# Altium PCB PowerDistReva.PcbDoc
Units mm, origin at the board's own origin, x right, y up, seen from the top; angles counter-clockwise.
Board outline 152.4 x 101.6 mm, 2 copper layers (Top Layer, Bottom Layer); 24 components, 6 nets, 56 pads, 0 vias.
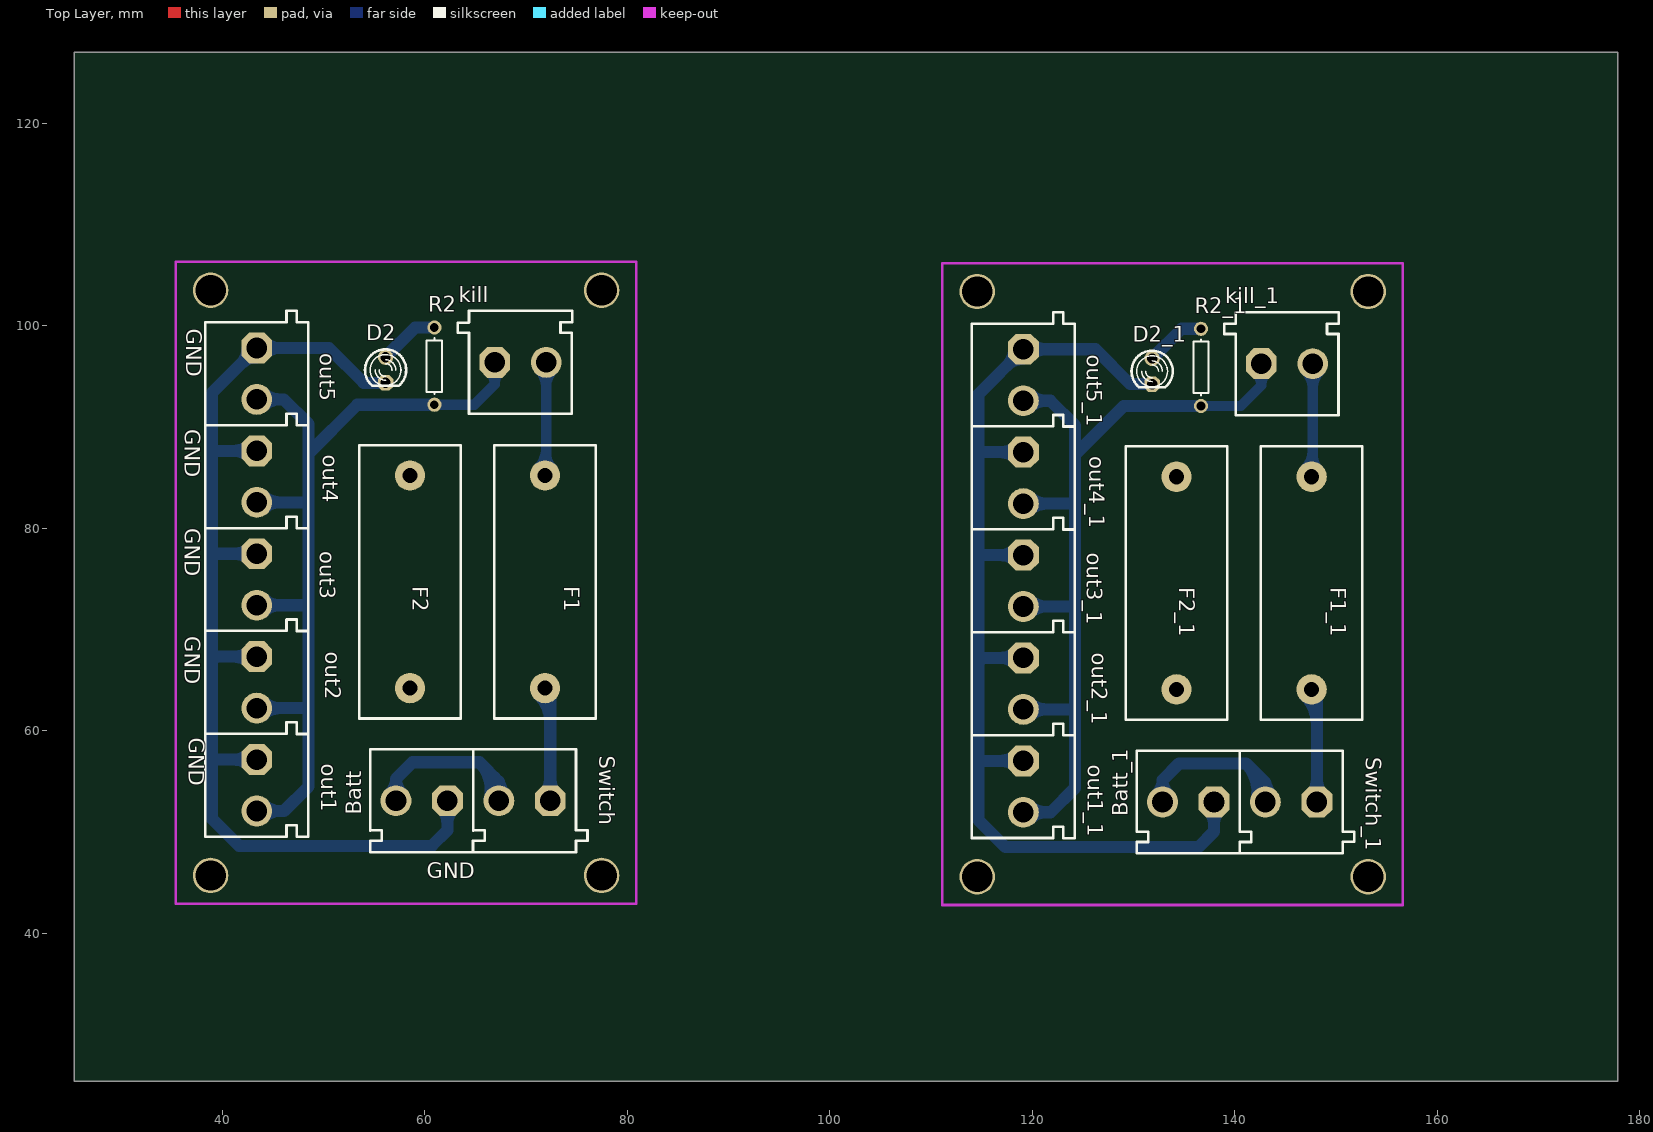
[diagram p0: Top Layer view]
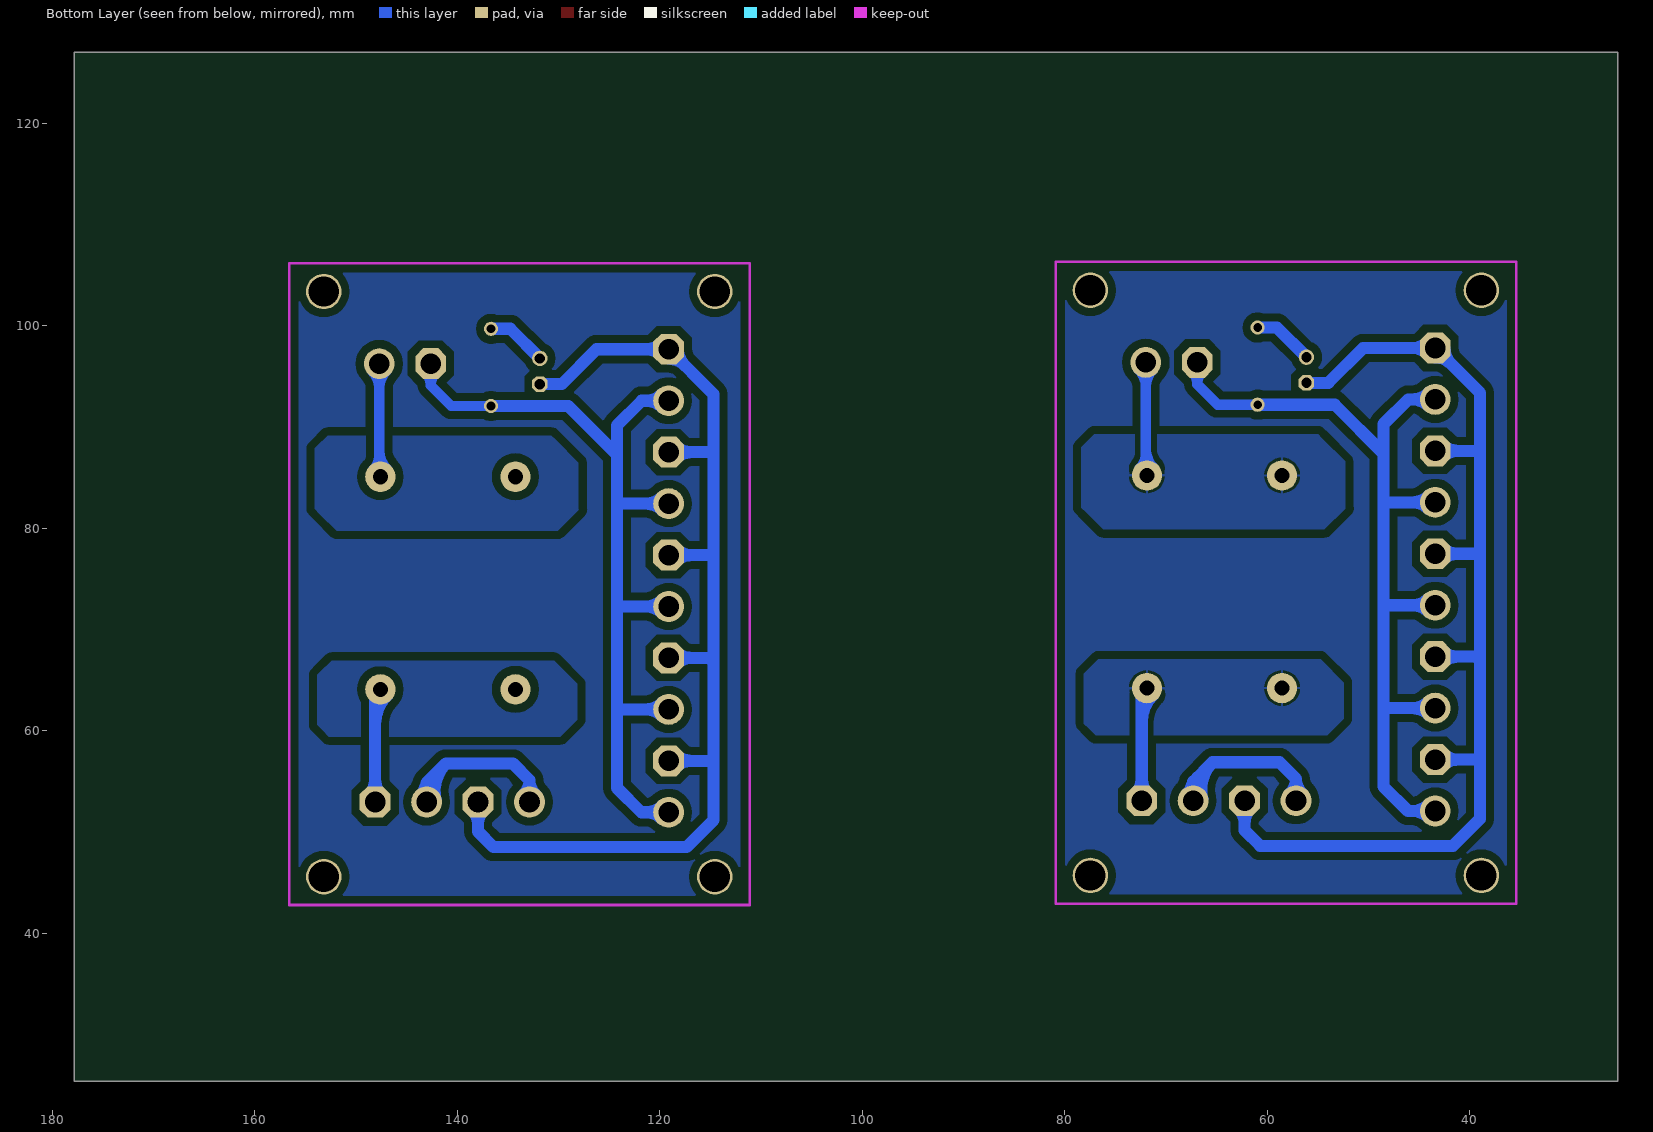
[diagram p1: Bottom Layer view, seen from below]

## Layer stack, top to bottom
Top Solder: solder mask 0.0102, Solder Resist, Dk 3.5
Top Layer: signal copper 0.0356
Dielectric 1: dielectric 0.32, FR-4, Dk 4.8
Bottom Layer: signal copper 0.0356
Bottom Solder: solder mask 0.0102, Solder Resist, Dk 3.5

## Board outline
25.4,25.4 177.8,25.4 177.8,127 25.4,127

## Design rules (kind name [scope] priority, off if disabled: settings)
Clearance [All] p1: gap=0.8
PolygonConnect [All] p1: connectstyle=Relief reliefconductorwidth=0.254 reliefentries=4 polygonreliefangle="90 Angle" airgapwidth=0.254
RoutingVias [All] p1: holewidth=0.711 width=1.27 viastyle="Through Hole" minholewidth=0.711 minwidth=1.27 maxholewidth=0.711 maxwidth=1.27
SolderMaskExpansion [All] p1: expansion=0.102
Width [All] p1: maxlimit=1.5 minlimit=1 preferedwidth=1 minimp=50.000000 maximp=50.000000 favimp=50.000000
29 further rules are at their usual default settings.

## Components (designator, comment, footprint, x,y, rotation, side; value= is the part's Value field where it differs from the comment)
Batt "CON2 pin blue" My_CN2 64.77,48.006 r180 top
Batt_1 "CON2 pin blue" My_CN2 140.462,47.879 r180 top (schematic designator Batt)
D2 "LED" My_LED3MM 56.134,95.631 r270 top
D2_1 "LED" My_LED3MM 131.826,95.504 r270 top (schematic designator D2)
F1 "Fuse 2" PCBComponent_1 71.882,85.217 r270 top
F1_1 "Fuse 2" PCBComponent_1 147.574,85.09 r270 top (schematic designator F1)
F2 "Fuse 2" PCBComponent_1 58.547,85.217 r270 top
F2_1 "Fuse 2" PCBComponent_1 134.239,85.09 r270 top (schematic designator F2)
kill "CON2 pin blue" My_CN2 64.389,101.473 r0 top
kill_1 "CON2 pin blue" My_CN2 140.081,101.346 r0 top (schematic designator kill)
out1 "CON2 pin blue" My_CN2 48.514,59.69 r270 top
out1_1 "CON2 pin blue" My_CN2 124.206,59.563 r270 top (schematic designator out1)
out2 "CON2 pin blue" My_CN2 48.514,69.85 r270 top
out2_1 "CON2 pin blue" My_CN2 124.206,69.723 r270 top (schematic designator out2)
out3 "CON2 pin blue" My_CN2 48.514,80.01 r270 top
out3_1 "CON2 pin blue" My_CN2 124.206,79.883 r270 top (schematic designator out3)
out4 "CON2 pin blue" My_CN2 48.514,90.17 r270 top
out4_1 "CON2 pin blue" My_CN2 124.206,90.043 r270 top (schematic designator out4)
out5 "CON2 pin blue" My_CN2 48.514,100.33 r270 top
out5_1 "CON2 pin blue" My_CN2 124.206,100.203 r270 top (schematic designator out5)
R2 "Res1" AXIAL-0.3 60.96,96.012 r90 top
R2_1 "Res1" AXIAL-0.3 136.652,95.885 r90 top (schematic designator R2)
Switch "CON2 pin blue" My_CN2 74.93,48.006 r180 top
Switch_1 "CON2 pin blue" My_CN2 150.622,47.879 r180 top (schematic designator Switch)

## Footprints (in the part's own frame and the unit in brackets; to place one, negate y for a bottom-side part, rotate by r counter-clockwise, add the part's x,y. Pads: shape width x height; smd on the part's side, far side on the other; paste and mask are expansions set on the pad)
AXIAL-0.3 [mm] "Axial Device, Thru-Hole; 2 Leads; 0.3 in Pin Spacing"
  round 1.4 hole 0.85: 1(-3.81,0) 2(3.81,0)
  silkscreen extent -2.77,-0.76 2.77,0.76
My_CN2 [mil]
  oct 120x120 hole 80: 1(99.5,-200.5)
  round 120 hole 80: 2(299.5,-200.5)
  silkscreen extent -45,-400 400,0
My_LED3MM [mil]
  round 60 hole 40: A(-50,0)
  oct 60x60 hole 40: K(50,0)
  silkscreen extent -80,-80 62,80
PCBComponent_1 [mm]
  round 3 hole 1.5: 1(0,0) 2(21,0)
  silkscreen extent -3,-5 24,5

## Part data
Batt Batt_1 kill kill_1 out1 out1_1 out2 out2_1 out3 out3_1 out4 out4_1 out5 out5_1 Switch Switch_1: "Connector blue screw"
D2 D2_1: "Typical INFRARED GaAs LED"
F1 F1_1 F2 F2_1: "Fuse"
R2 R2_1: "Resistor"

## Free pads (board coordinates)
  round 3.5 hole 3: 0(38.862,103.505) 0(77.47,45.72) 0(77.47,103.505) 0(114.554,103.378) 0(153.162,45.593) 0(153.162,103.378) 4(38.862,45.72) 4(114.554,45.593)

## Nets (pads, with @x,y where several pads share a name; then routed paths per layer and width w, separated by ;. In a path a pad name is that pad's centre, name@x,y a point inside that pad or via, vN(x,y) a via of type N, cw(c..) or ccw(c..) an arc to the next point about the centre after c; other vN are vias at no path point)
GND: Batt.1 D2.K out1.1 out2.1 out3.1 out4.1 out5.1 | length 132.8
  Bottom Layer w1.2: 39.002,57.163 out1.1 ; 39.002,77.483 out3.1 ; 39.002,87.643 out4.1 ; out5.1@42.497,97.803 cw(c40.267,97.803) 41.844,96.225 cw(c43.421,94.648) out5.1@43.421,96.879 ; out1.1@42.768,56.509 ccw(c41.191,54.932) 41.191,57.163 ccw(c41.191,59.393) out1.1@42.768,57.816 ; out2.1@42.768,66.669 ccw(c41.191,65.092) 41.191,67.323 ccw(c41.191,69.553) out2.1@42.768,67.976 ; out3.1@42.768,76.829 ccw(c41.191,75.252) 41.191,77.483 ccw(c41.191,79.713) out3.1@42.768,78.136 ; out4.1@42.768,86.989 ccw(c41.191,85.412) 41.191,87.643 ccw(c41.191,89.873) out4.1@42.768,88.296 ; out2.1 39.383,67.323 38.989,66.929 ; out5.1@44.075,97.149 cw(c45.652,95.572) 45.652,97.803 cw(c45.652,100.033) out5.1@44.075,98.456 ; D2.K 53.975,94.361 50.533,97.803 out5.1 38.989,93.37 38.989,66.929 ; Batt.1@61.589,52.445 cw(c60.012,50.868) 62.243,50.868 cw(c64.473,50.868) Batt.1@62.896,52.445 ; Batt.1 62.243,50.178 60.706,48.641 41.656,48.641 38.989,51.308 38.989,66.929
NetD2_A: D2.A R2.2 | length 6
  Bottom Layer w1.2: D2.A 59.055,99.822 R2.2
NetF1_2: F1.2 F2.2 Switch.1 | length 17.9
  Bottom Layer w1.2: F1.2@71.246,63.581 cw(c68.452,60.787) 72.403,60.787 ; Switch.1@71.749,53.752 ccw(c70.172,55.329) 72.403,55.329 ccw(c74.633,55.329) Switch.1@73.056,53.752 ; F1.2 72.403,63.696 Switch.1
VCC: Batt.2 Switch.2 | length 28.1
  Bottom Layer w1.2: Batt.2@56.525,53.767 ccw(c55.103,55.258) 57.163,55.258 ; Batt.2 57.163,55.258 ; Batt.2@57.801,53.767 cw(c59.223,55.258) 57.163,55.258 ; Switch.2@66.423,53.311 ccw(c62.7,54.19) 65.405,56.896 ; Switch.2@66.758,53.83 ccw(c65.873,54.978) 67.323,54.978 ; 66.927,55.374 cw(c65.162,53.609) Switch.2@67.591,53.035 ; Switch.2 67.323,54.978 ; Switch.2@67.887,53.83 cw(c68.772,54.978) 67.323,54.978 ; 57.163,55.258 58.801,56.896 65.405,56.896 ; 65.405,56.896 67.323,54.978
VDD: F1.1 F2.1 kill.2 | length 18.7
  Bottom Layer w1: F1.1@71.175,85.924 ccw(c69.192,87.907) 71.996,87.907 ; kill.2@71.272,95.656 cw(c69.524,93.908) 71.996,93.908 cw(c74.468,93.908) kill.2@72.72,95.656 ; F1.1@71.996,85.331 kill.2 ; 71.996,87.355 ccw(c74.02,87.355) F1.1@72.589,85.924
VDD1: kill.1 out1.2 out2.2 out3.2 out4.2 out5.2 R2.1 | length 107.2
  Bottom Layer w1: R2.1 64.897,92.202 66.916,94.221 ; kill.1@66.268,95.587 cw(c65.153,94.221) 66.916,94.221 ; kill.1 66.916,94.221 ; kill.1@67.564,95.587 ccw(c68.68,94.221) 66.916,94.221
  Bottom Layer w1.2: out1.2 46.114,52.083 48.52,54.489 48.52,87.382 ; out2.2 48.381,62.243 ; out3.2 48.508,72.403 ; out4.2 48.508,82.563 ; out5.2 46.088,92.723 48.52,90.291 48.52,87.382 ; out1.2@44.075,51.429 cw(c45.652,49.852) 45.652,52.083 cw(c45.652,54.313) out1.2@44.075,52.736 ; out2.2@44.075,61.589 cw(c45.652,60.012) 45.652,62.243 cw(c45.652,64.473) out2.2@44.075,62.896 ; out3.2@44.075,71.749 cw(c45.652,70.172) 45.652,72.403 cw(c45.652,74.633) out3.2@44.075,73.056 ; out4.2@44.075,81.909 cw(c45.652,80.332) 45.652,82.563 cw(c45.652,84.793) out4.2@44.075,83.216 ; out5.2@44.075,92.069 cw(c45.652,90.492) 45.652,92.723 cw(c45.652,94.953) out5.2@44.075,93.376 ; R2.1 53.34,92.202 48.52,87.382
pads on no net: Batt_1.1 Batt_1.2 D2_1.A D2_1.K F1_1.1 F1_1.2 F2_1.1 F2_1.2 kill_1.1 kill_1.2 out1_1.1 out1_1.2 out2_1.1 out2_1.2 out3_1.1 out3_1.2 out4_1.1 out4_1.2 out5_1.1 out5_1.2 R2_1.1 R2_1.2 Switch_1.1 Switch_1.2
copper on no net: | length 310.7
  Bottom Layer w1: 136.652,92.075 140.589,92.075 142.608,94.094 ; 141.96,95.46 cw(c140.845,94.094) 142.608,94.094 ; 142.608,96.253 142.608,94.094 ; 143.256,95.46 ccw(c144.372,94.094) 142.608,94.094 ; 146.867,85.797 ccw(c144.884,87.78) 147.688,87.78 ; 146.964,95.529 cw(c145.216,93.781) 147.688,93.781 cw(c150.16,93.781) 148.412,95.529 ; 147.688,85.204 147.688,96.253 ; 147.688,87.228 ccw(c149.712,87.228) 148.281,85.797
  Bottom Layer w1.2: 114.694,57.036 119.113,57.036 ; 114.694,77.356 119.113,77.356 ; 114.694,87.516 119.113,87.516 ; 118.189,97.676 cw(c115.959,97.676) 117.536,96.098 cw(c119.113,94.521) 119.113,96.752 ; 118.46,56.382 ccw(c116.883,54.805) 116.883,57.036 ccw(c116.883,59.266) 118.46,57.689 ; 118.46,66.542 ccw(c116.883,64.965) 116.883,67.196 ccw(c116.883,69.426) 118.46,67.849 ; 118.46,76.702 ccw(c116.883,75.125) 116.883,77.356 ccw(c116.883,79.586) 118.46,78.009 ; 118.46,86.862 ccw(c116.883,85.285) 116.883,87.516 ccw(c116.883,89.746) 118.46,88.169 ; 119.113,51.956 121.806,51.956 124.212,54.362 124.212,87.255 ; 119.113,62.116 124.073,62.116 ; 119.113,67.196 115.075,67.196 114.681,66.802 ; 119.113,72.276 124.2,72.276 ; 119.113,82.436 124.2,82.436 ; 119.113,92.596 121.78,92.596 124.212,90.164 124.212,87.255 ; 119.767,51.302 cw(c121.344,49.725) 121.344,51.956 cw(c121.344,54.186) 119.767,52.609 ; 119.767,61.462 cw(c121.344,59.885) 121.344,62.116 cw(c121.344,64.346) 119.767,62.769 ; 119.767,71.622 cw(c121.344,70.045) 121.344,72.276 cw(c121.344,74.506) 119.767,72.929 ; 119.767,81.782 cw(c121.344,80.205) 121.344,82.436 cw(c121.344,84.666) 119.767,83.089 ; 119.767,91.942 cw(c121.344,90.365) 121.344,92.596 cw(c121.344,94.826) 119.767,93.249 ; 119.767,97.022 cw(c121.344,95.445) 121.344,97.676 cw(c121.344,99.906) 119.767,98.329 ; 131.826,94.234 129.667,94.234 126.225,97.676 119.113,97.676 114.681,93.243 114.681,66.802 ; 131.826,96.774 134.747,99.695 136.652,99.695 ; 132.217,53.64 ccw(c130.795,55.131) 132.855,55.131 ; 132.855,52.972 132.855,55.131 ; 133.493,53.64 cw(c134.915,55.131) 132.855,55.131 ; 136.652,92.075 129.032,92.075 124.212,87.255 ; 137.281,52.318 cw(c135.704,50.741) 137.935,50.741 cw(c140.165,50.741) 138.588,52.318 ; 137.935,52.972 137.935,50.051 136.398,48.514 117.348,48.514 114.681,51.181 114.681,66.802 ; 142.115,53.184 ccw(c138.392,54.063) 141.097,56.769 ; 142.45,53.703 ccw(c141.565,54.851) 143.015,54.851 ; 142.619,55.247 cw(c140.854,53.482) 143.283,52.908 ; 143.015,52.972 143.015,54.851 ; 143.579,53.703 cw(c144.464,54.851) 143.015,54.851 ; 146.938,63.454 cw(c144.144,60.66) 148.095,60.66 ; 147.441,53.625 ccw(c145.864,55.202) 148.095,55.202 ccw(c150.325,55.202) 148.748,53.625 ; 147.574,64.09 148.095,63.569 148.095,52.972 ; 132.855,55.131 134.493,56.769 141.097,56.769 ; 141.097,56.769 143.015,54.851

## Polygon pours and split planes (outlines as drawn)
VDD on Bottom Layer "Bottom Layer-No Net" (solid, pour order 8): 52.324,82.042 52.324,86.614 54.61,88.9 54.991,89.281 69.85,89.281 77.089,89.281 78.105,88.265 78.359,88.011 78.359,83.693 78.359,82.042 77.851,81.534 76.2,79.883 55.88,79.883 54.356,79.883 52.197,82.042
NetF1_2 on Bottom Layer "Bottom Layer-No Net" (solid, pour order 10): 52.451,59.563 52.451,64.77 54.737,67.056 74.295,67.056 76.708,67.056 77.851,65.913 78.105,65.659 78.105,62.484 78.105,60.706 77.597,60.198 76.962,59.563 57.15,59.563 54.102,59.563 52.451,61.214
no net on Bottom Layer "Bottom Layer-No Net" (solid, pour order 12): 35.433,106.299 80.772,106.299 80.899,106.172 80.899,42.926 35.433,42.926 35.433,106.299
no net on Bottom Layer "Bottom Layer-No Net" (solid, pour order 11): 111.125,106.172 156.464,106.172 156.591,106.045 156.591,42.799 111.125,42.799 111.125,106.172
no net on Bottom Layer "Bottom Layer-No Net" (solid, pour order 9): 128.143,59.436 128.143,64.643 130.429,66.929 149.987,66.929 152.4,66.929 153.543,65.786 153.797,65.532 153.797,62.357 153.797,60.579 153.289,60.071 152.654,59.436 132.842,59.436 129.794,59.436 128.143,61.087
no net on Bottom Layer "Bottom Layer-No Net" (solid, pour order 7): 128.016,81.915 128.016,86.487 130.302,88.773 130.683,89.154 145.542,89.154 152.781,89.154 153.797,88.138 154.051,87.884 154.051,83.566 154.051,81.915 153.543,81.407 151.892,79.756 131.572,79.756 130.048,79.756 127.889,81.915

## Keep-outs
Keep-Out Layer:
  lines w0.254: 35.433,42.926 35.433,106.299 80.899,106.299 80.899,42.926 35.433,42.926 ; 111.125,42.799 156.591,42.799 156.591,106.172 111.125,106.172 111.125,42.799

## Silkscreen, mask and mechanical layers (free items; w line width, h text height)
Top Overlay:
  text "GND" at 36.449,99.695 h1.52 r270
  text "GND" at 36.322,89.789 h1.52 r270
  text "GND" at 36.322,80.01 h1.52 r270
  text "GND" at 36.322,69.342 h1.52 r270
  text "GND" at 36.703,59.309 h1.52 r270
  text "GND" at 60.198,45.466 h1.52

## Dimensions
74.943,58.179 to 76.882,61.217 on Mechanical 1
76.882,88.217 to 74.536,91.3 on Mechanical 1
48.501,90.183 to 53.547,88.217 on Mechanical 1
80.899,106.299 to 80.899,42.926 on Mechanical 1
35.433,106.299 to 80.899,106.299 on Mechanical 1
77.47,103.505 to 77.47,45.72 on Mechanical 1
38.862,103.505 to 77.47,103.505 on Mechanical 1
38.862,45.72 to 35.433,42.926 on Mechanical 1
38.862,45.72 to 35.433,42.926 on Mechanical 1
77.47,45.72 to 80.899,42.926 on Mechanical 1
77.47,45.72 to 80.899,42.926 on Mechanical 1
77.47,103.505 to 80.899,106.299 on Mechanical 1
77.47,103.505 to 80.899,106.299 on Mechanical 1
38.862,103.505 to 35.433,106.299 on Mechanical 1
38.862,103.505 to 35.433,106.299 on Mechanical 1
114.554,103.378 to 111.125,106.172 on Mechanical 1
114.554,103.378 to 111.125,106.172 on Mechanical 1
153.162,103.378 to 156.591,106.172 on Mechanical 1
153.162,103.378 to 156.591,106.172 on Mechanical 1
153.162,45.593 to 156.591,42.799 on Mechanical 1
153.162,45.593 to 156.591,42.799 on Mechanical 1
114.554,45.593 to 111.125,42.799 on Mechanical 1
114.554,45.593 to 111.125,42.799 on Mechanical 1
114.554,103.378 to 153.162,103.378 on Mechanical 1
153.162,103.378 to 153.162,45.593 on Mechanical 1
111.125,106.172 to 156.591,106.172 on Mechanical 1
156.591,106.172 to 156.591,42.799 on Mechanical 1
124.193,90.056 to 129.239,88.09 on Mechanical 1
152.574,88.09 to 150.228,91.173 on Mechanical 1
150.635,58.052 to 152.574,61.09 on Mechanical 1